# Altium PCB maintest.PcbDoc
Units mil, origin at the board's own origin, x right, y up, seen from the top; angles counter-clockwise.
Board outline 2900 x 2640 mil, 2 copper layers (Top Layer, Bottom Layer); 162 components, 79 nets, 347 pads, 0 vias.
Unrouted connection lines stored in the file: 128.
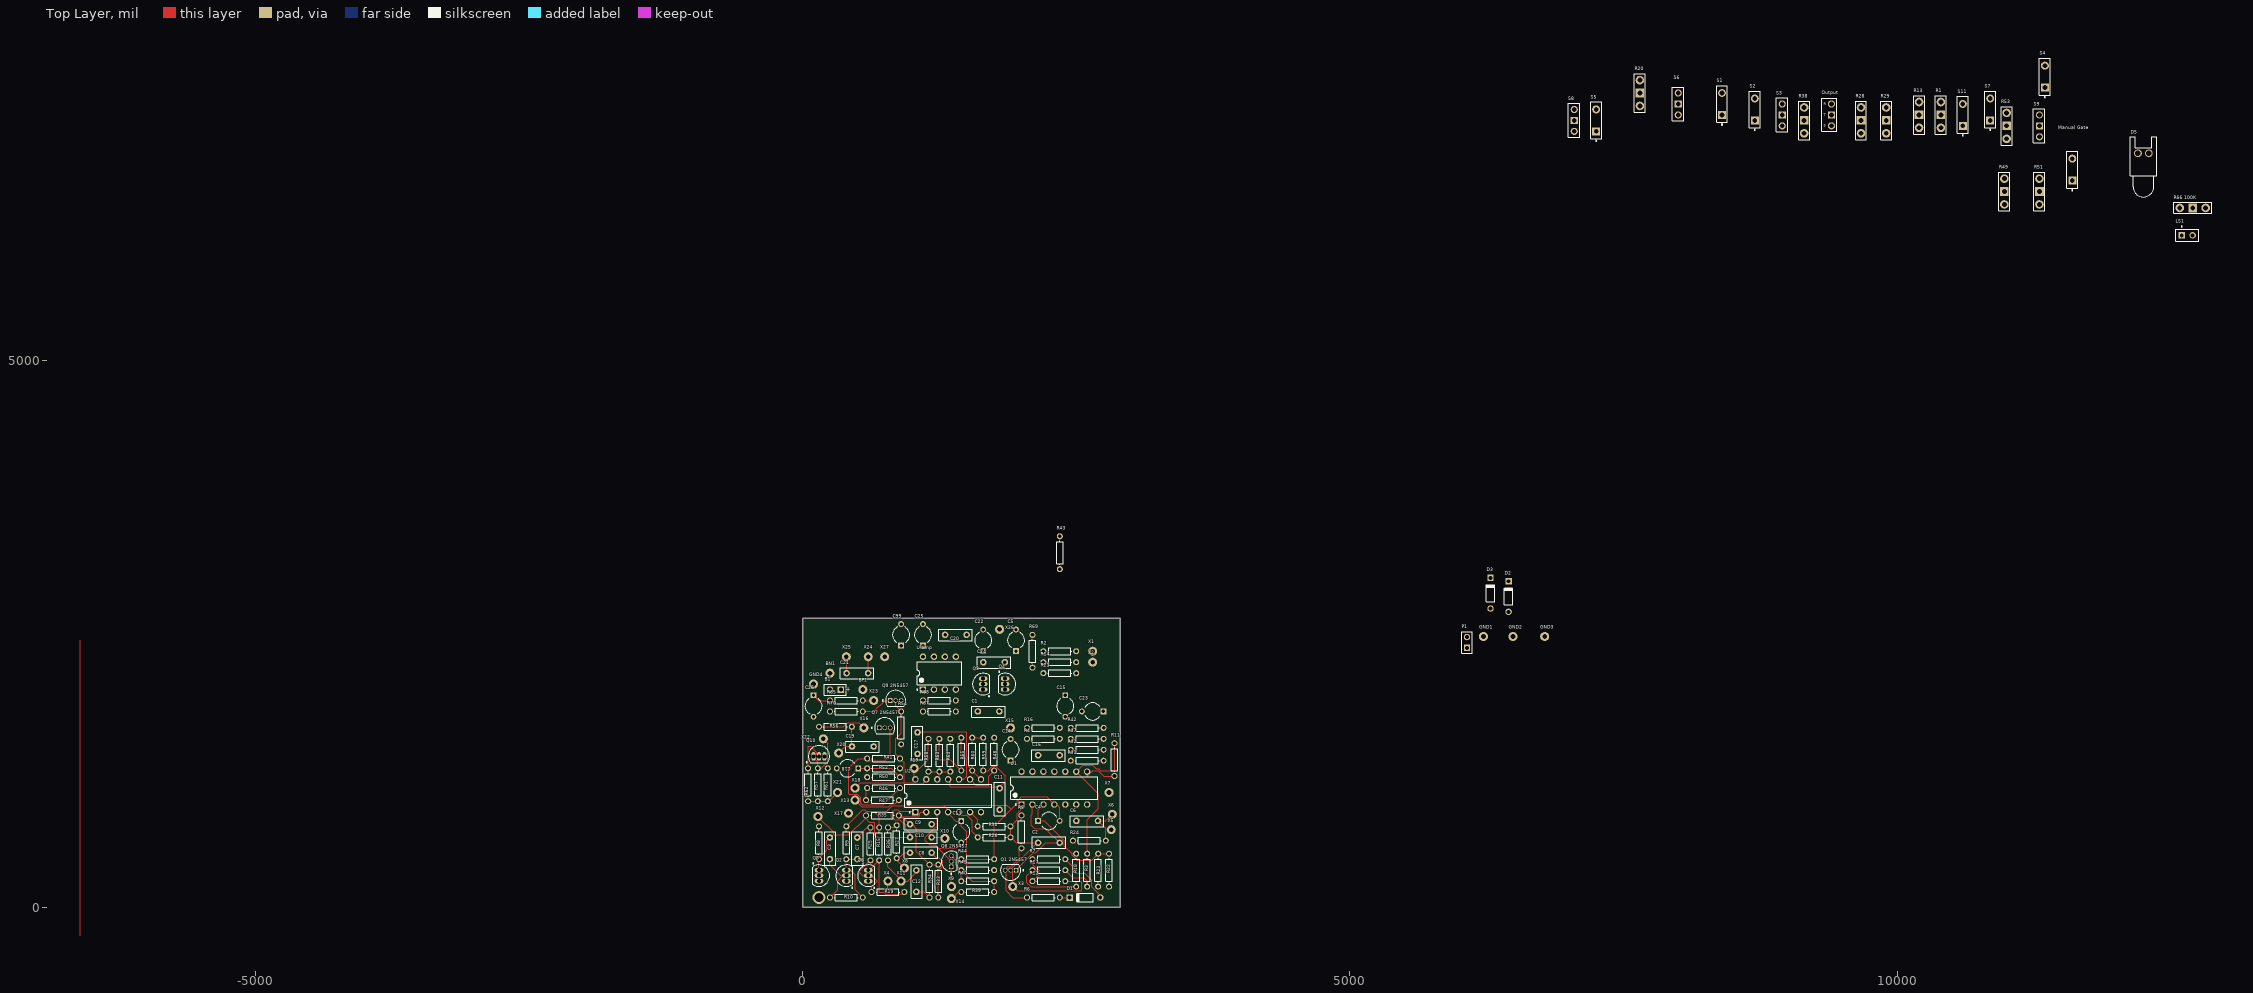
[diagram p0: Top Layer view]
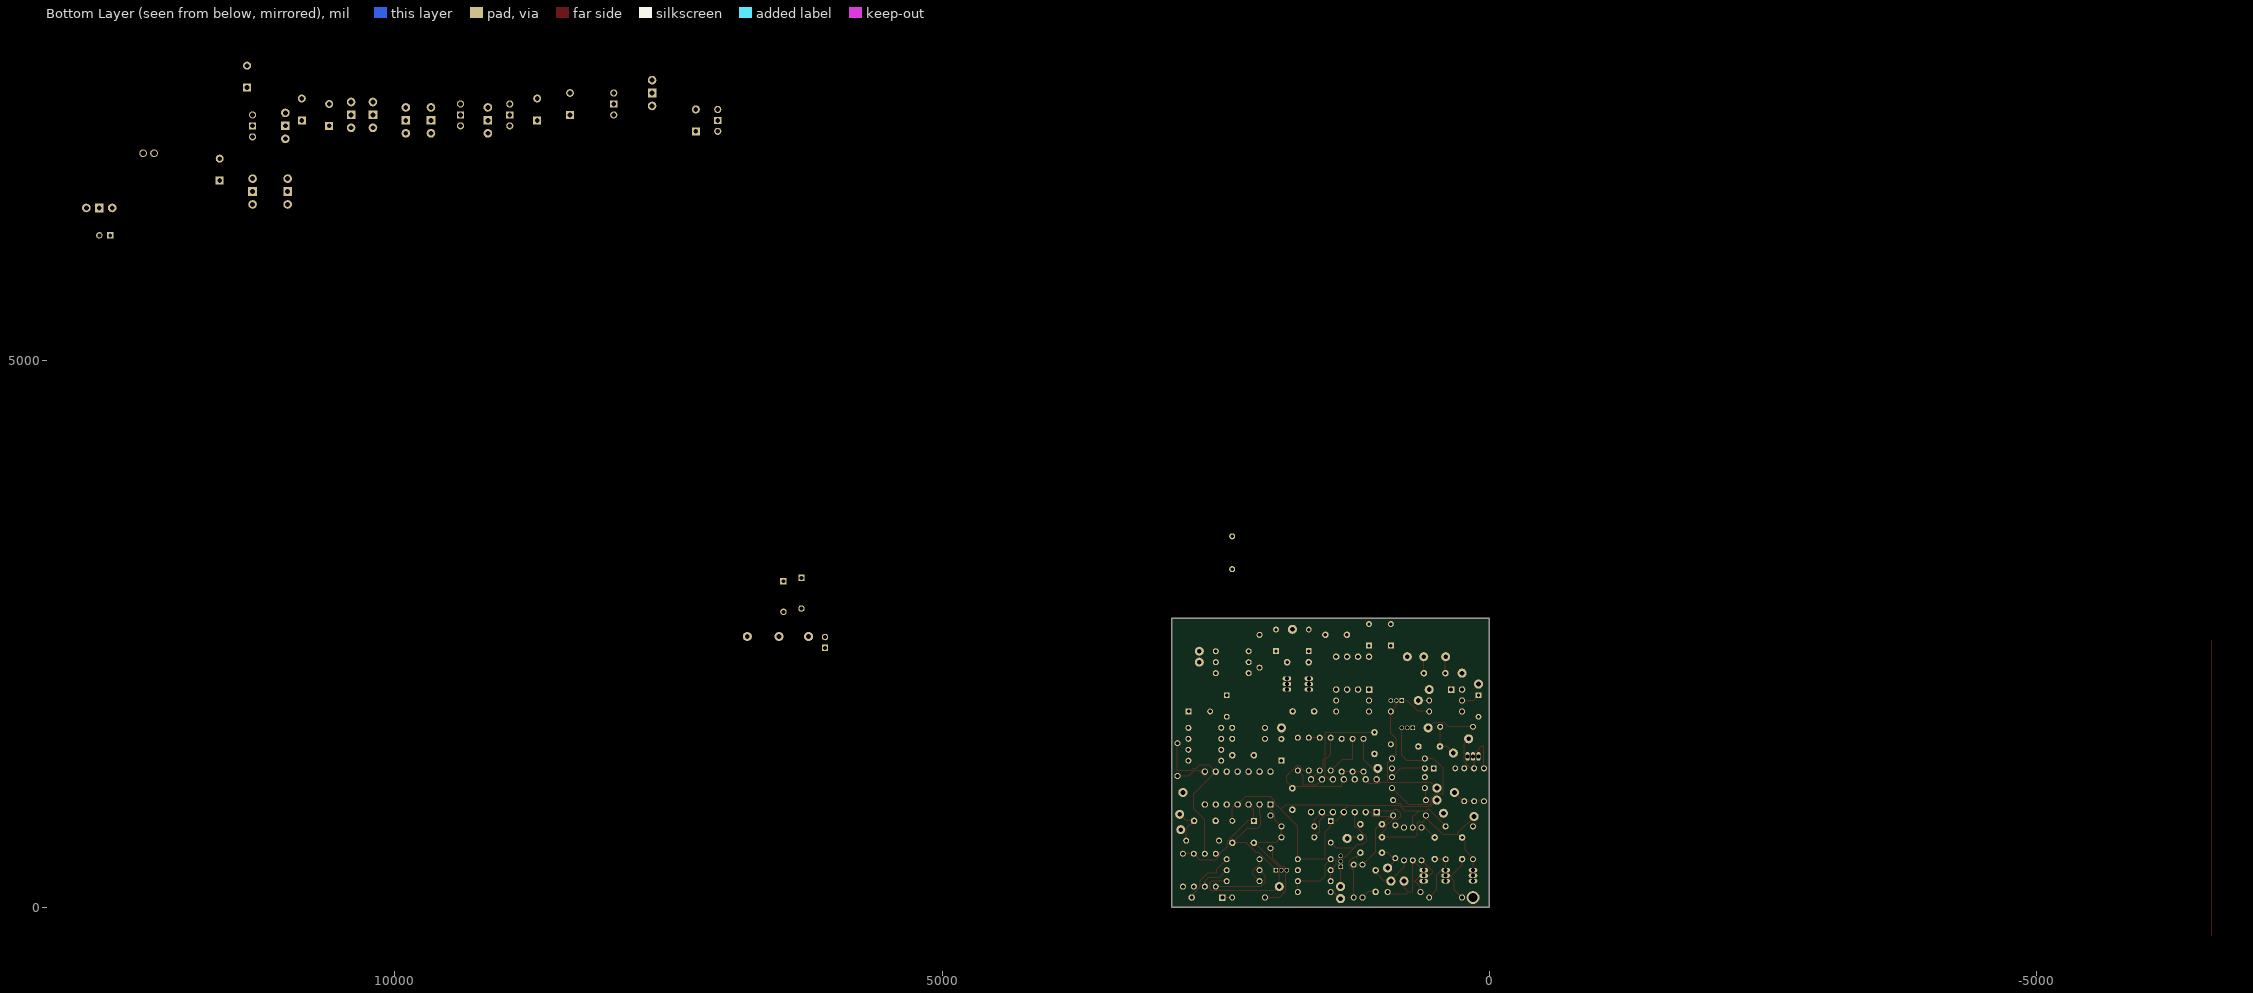
[diagram p1: Bottom Layer view, seen from below]

## Layer stack, top to bottom
Top Solder: solder mask 0.4, Solder Resist, Dk 3.5
Top Layer: signal copper 1.4
Dielectric 1: dielectric 12.6, FR-4, Dk 4.8
Bottom Layer: signal copper 1.4
Bottom Solder: solder mask 0.4, Solder Resist, Dk 3.5

## Board outline
0,0 0,2640 2900,2640 2900,0

## Design rules (kind name [scope] priority, off if disabled: settings)
Clearance [All] p1: gap=6 ignorepadtopadclearanceinfootprint=FALSE
PolygonConnect [All] p1: connectstyle=Relief reliefconductorwidth=10 reliefentries=4 polygonreliefangle="90 Angle" airgapwidth=10
RoutingVias [All] p1: holewidth=28 width=50 viastyle="Through Hole" minholewidth=28 minwidth=50 maxholewidth=28 maxwidth=50
SolderMaskExpansion [All] p1: expansion=4
UnRoutedNet [All] p1: checkbadconnections=TRUE
Width [All] p1: maxlimit=25 minlimit=6 preferedwidth=10 minimp=50.000000 maximp=50.000000 favimp=50.000000
29 further rules are at their usual default settings.

## Classes and differential pairs
component class "AD Generator": C18 D2 D3 "Manual Gate" "Q9 2N5457" Q10 R50 R51 R52 R53 R54 R57 R58 R61 R62 R63 R64 S8 X17 X18 X19 X21 X22
component class "Audio Amplifier": C20 C21 C22 C24 C25 C99 LS1 Output "R66 100K" R67 R68 R69 "U Amp" X24 X25 X26 X27
component class LFO: C16 C17 C19 C26 D5 R48 R49 R55 R56 R59 R60 R65 R70 S7 S9 X15 X16 X20 X23
component class Top: B1 BN1 BP1 C13 C14 C15 C23 GND1 GND2 GND3 GND4 P1 R37 R42 S11
component class VCA: "Q7 2N5457" R41 R46 R47 S5 X12 X13
component class "VC LPF": C8 C9 C10 C12 "Q8 2N5457" R27 R28 R29 R33 R34 R35 R36 R38 R39 R40 R43 R44 R45 S3 S4 S6 U2 X8 X9 X10 X11 X14
component class VCO: C1 C2 C4 C5 C6 C11 D1 "Q1 2N5457" Q3 Q4 R1 R2 R3 R4 R5 R6 R7 R11 R12 R13 R14 R16 R17 R18 R20 R21 R22 R23 R24 R26 R30 R31 R32 S1 S2 U1 X1 X2 X3 X5 X6 X7
component class WNS: C3 C7 Q2 Q5 Q6 R8 R9 R10 R15 R19 R25 X4

## Components (designator, comment, footprint, x,y, rotation, side; value= is the part's Value field where it differs from the comment)
B1 "9V Battery" BAT-2 300,1990 r180 top
BN1 "Pad" Pad 250,2140 r0 top
BP1 "Pad" Pad 550,1990 r0 top
C1 "Film" "Cap Film 5" 1700,1790 r180 top value=100pF
C2 "Film" "Cap Film 5" 2250,590 r0 top value=0.001uF
C3 "Cap Film 5" "Cap Film 5" 250,540 r270 top value=0.1uF
C4 "" CAPR5-4X5 2250,790 r0 top value=.1uF
C5 "" CAPR5-4X5 1950,2440 r90 top value=.1uF
C6 "Film" "Cap Film 5" 2600,790 r180 top value=0.1uF
C7 "Film" "Cap Film 5" 500,540 r270 top value=0.1uF
C8 "Film" "Cap Film 5" 1080,500 r0 top value=0.1uF
C9 "Film" "Cap Film 5" 1080,760 r0 top value=0.01uF
C10 "Film" "Cap Film 5" 1080,640 r180 top value=0.001uF
C11 "Film" "Cap Film 5" 1800,990 r270 top value=0.1uF
C12 "Film" "Cap Film 5" 1040,240 r270 top value=0.1uF
C13 "Cap2" CAPR5-4X5 1450,690 r270 top value=10uF
C14 "Cap2" CAPR5-4X5 1900,1440 r90 top value=10uF
C15 "" CAPR5-4X5 2400,1840 r270 top value=470uF
C16 "Cap Film 5" "Cap Film 5" 2250,1390 r180 top value=1uF
C17 "Cap Film 5" "Cap Film 5" 1050,1500 r90 top value=1uF
C18 "" CAPR5-4X5 410,1270 r180 top value=4.7uF
C19 "Cap Film 5" "Cap Film 5" 550,1470 r180 top value=1uF
C20 "Cap Film 5" "Cap Film 5" 1400,2490 r180 top value=0.1uF
C21 "Cap Film 5" "Cap Film 5" 500,2140 r180 top value=0.1uF
C22 "" CAPR5-4X5 1650,2440 r90 top value=220uF
C23 "" CAPR5-4X5 2650,1790 r180 top value=470uF
C24 "Cap Film 5" "Cap Film 5" 1750,2240 r180 top value=0.047uF
C25 "" CAPR5-4X5 1100,2490 r90 top value=10uF
C26 "" CAPR5-4X5 100,1840 r270 top value=470uF
C99 "" CAPR5-4X5 900,2490 r90 top value=10uF
D1 "Diode 1N914" DO-35 2580,90 r180 top
D2 "Diode 1N914" DO-35 6450,2840 r90 top
D3 "Diode 1N914" DO-35 6285,2870 r90 top
D5 "LED0" LED-0 12250,6890 r0 top
GND1 "Pad" Pad 6220,2475 r90 top
GND2 "Pad" Pad 6490,2475 r90 top
GND3 "Pad" Pad 6780,2475 r90 top
GND4 "Pad" Pad 100,2040 r90 top
LS1 "Speaker 8ohm 1W" PIN2 12600,6140 r0 top
"Manual Gate" "S10" SPST-2 11600,6740 r90 top
Output "LineOut" "Stereo Jack" 9400,7340 r270 top
P1 "Ground" HDR1X2 6070,2370 r90 top
"Q1 2N5457" "" ONSC-TO-92-3-29-11 1900,340 r180 top
Q2 "" TO-92A 400,290 r0 top
Q3 "2N3904" TO-92A 1650,2040 r0 top
Q4 "2N3904" TO-92A 1850,2040 r180 top
Q5 "" TO-92A 150,290 r180 top
Q6 "" TO-92A 600,290 r0 top
"Q7 2N5457" "" ONSC-TO-92-3-29-11 750,1640 r0 top
"Q8 2N5457" "" ONSC-TO-92-3-29-11 1360,420 r90 top
"Q9 2N5457" "" ONSC-TO-92-3-29-11 850,1890 r0 top
Q10 "" TO-92A 150,1380 r270 top
R1 "Potentiometer" Potentiometer 10400,7240 r0 top value=100K
R2 "Res1" AXIAL-0.3 2350,2340 r180 top value=75K
R3 "Res3" AXIAL-0.3 2600,340 r270 top value=270K
R4 "Res3" AXIAL-0.3 2200,1540 r0 top value=10K
R5 "Res1" AXIAL-0.3 2000,690 r270 top value=2M
R6 "Res1" AXIAL-0.3 2200,90 r0 top value=10K
R7 "Res1" AXIAL-0.3 2250,440 r0 top value=300K
R8 "Res1" AXIAL-0.3 150,590 r90 top value=1M
R9 "Res1" AXIAL-0.3 400,590 r90 top value=10K
R10 "Res1" AXIAL-0.3 400,90 r0 top value=470K
R11 "Res1" AXIAL-0.3 2850,1350 r270 top value=2K
R12 "Res1" AXIAL-0.3 2250,240 r180 top value=10K
R13 "Potentiometer" Potentiometer 10200,7240 r0 top value=100K
R14 "" AXIAL-0.3 2350,2240 r180 top value=100K
R15 "Res1" AXIAL-0.3 700,580 r90 top value=10K
R16 "Res3" AXIAL-0.3 2200,1640 r180 top value=2M
R17 "Res1" AXIAL-0.3 2250,340 r180 top value=10K
R18 "Res1" AXIAL-0.3 2500,340 r90 top value=15K
R19 "Res1" AXIAL-0.3 780,140 r0 top value=470K
R20 "Potentiometer" Potentiometer 7650,7440 r0 top value=100K
R21 "" AXIAL-0.3 2350,2140 r180 top value=36K
R22 "Res3" AXIAL-0.3 2800,340 r90 top value=4.7K
R23 "Res3" AXIAL-0.3 2700,340 r90 top value=4.7K
R24 "Res1" AXIAL-0.3 2620,610 r180 top value=100K
R25 "Res1" AXIAL-0.3 620,580 r90 top value=100K
R26 "Res1" AXIAL-0.3 1750,640 r180 top value=10K
R27 "Res1" AXIAL-0.3 860,600 r90 top value=47K
R28 "Potentiometer" Potentiometer 9670,7190 r0 top value=100K
R29 "Potentiometer" Potentiometer 9900,7190 r0 top value=100K
R30 "Res1" AXIAL-0.3 1750,740 r180 top value=2M
R31 "Res1" AXIAL-0.3 2600,1340 r180 top value=100K
R32 "Res1" AXIAL-0.3 2600,1440 r180 top value=10K
R33 "Res1" AXIAL-0.3 1240,240 r90 top value=4.7M
R34 "Res1" AXIAL-0.3 1160,240 r90 top value=3M
R35 "Res1" AXIAL-0.3 730,840 r180 top value=4.7M
R36 "Res1" AXIAL-0.3 780,580 r90 top value=47K
R37 "Res1" AXIAL-0.3 2600,1540 r0 top value=4.7
R38 "Potentiometer" Potentiometer 9150,7190 r0 top value=100K
R39 "Res1" AXIAL-0.3 1600,140 r0 top value=39K
R40 "Res1" AXIAL-0.3 1600,240 r180 top value=39K
R41 "Res1" AXIAL-0.3 740,1360 r0 top value=470K
R42 "Res1" AXIAL-0.3 2600,1640 r0 top value=4.7K
R43 "Res1" AXIAL-0.3 2350,3240 r90 top value=27K
R44 "Res1" AXIAL-0.3 1600,440 r180 top value=100K
R45 "Res1" AXIAL-0.3 1600,340 r180 top value=100K
R46 "Res1" AXIAL-0.3 740,1090 r0 top value=1M
R47 "Res1" AXIAL-0.3 730,980 r0 top value=100K
R48 "Res1" AXIAL-0.3 1750,1400 r90 top value=3K
R49 "Potentiometer" Potentiometer 10980,6540 r0 top
R50 "Res1" AXIAL-0.3 740,1190 r0 top value=820
R51 "Potentiometer" Potentiometer 11300,6540 r0 top value=1M
R52 "R52" AXIAL-0.3 740,1270 r0 top value=10K
R53 "Potentiometer" Potentiometer 11000,7140 r0 top value=1M
R54 "" AXIAL-0.3 900,1640 r90 top value=4.7K
R55 "Res1" AXIAL-0.3 1450,1400 r90 top value=100K
R56 "Res1" AXIAL-0.3 300,1650 r0 top value=75K
R57 "Res1" AXIAL-0.3 140,1120 r90 top value=200
R58 "R52" AXIAL-0.3 1150,1390 r90 top value=100K
R59 "Res1" AXIAL-0.3 1650,1400 r90 top value=100K
R60 "Res1" AXIAL-0.3 1550,1400 r270 top value=100K
R61 "Res1" AXIAL-0.3 230,1120 r270 top value=10K
R62 "Res1" AXIAL-0.3 50,1120 r90 top value=10K
R63 "R52" AXIAL-0.3 1250,1390 r90 top value=150K
R64 "R52" AXIAL-0.3 1350,1390 r90 top value=150K
R65 "Res1" AXIAL-0.3 400,1890 r0 top value=3K
"R66 100K" "Potentiometer" Potentiometer 12700,6390 r90 top
R67 "Res1" AXIAL-0.3 1250,1790 r0 top value=100K
R68 "Res1" AXIAL-0.3 1250,1890 r0 top value=20K
R69 "Res1" AXIAL-0.3 2100,2340 r270 top value=10
R70 "Res1" AXIAL-0.3 400,1790 r180 top value=3K
S1 "AR Mod On/Off" SPST-2 8400,7340 r90 top
S2 "Sync Effect" SPST-2 8700,7290 r90 top
S3 "VCO WAVE TO VCF SELECT" "SPDT Switch" 8950,7240 r90 top
S4 "NOISE TO VCF" SPST-2 11350,7590 r90 top
S5 "VCA Bypass" SPST-2 7250,7190 r90 top
S6 "VCF Mod Source Select" "SPDT Switch" 8000,7340 r90 top
S7 "SW-SPST" SPST-2 10850,7290 r90 top
S8 "Repeat" "SPDT Switch" 7050,7190 r90 top
S9 "SPDT Switch" "SPDT Switch" 11300,7140 r90 top
S11 "Power Supply Switch" SPST-2 10600,7240 r90 top
U1 "LM324J" J14A 2300,1090 r90 top
U2 "LM324J" J14A 1330,1020 r90 top
"U Amp" "LM386N-1" N08E 1250,2140 r90 top
X1 "Pad" Pad 2650,2340 r0 top
X2 "Pad" Pad 2650,2240 r0 top
X3 "Pad" Pad 1920,190 r0 top
X4 "Pad" Pad 780,240 r0 top
X5 "Pad" Pad 2820,710 r0 top
X6 "Pad" Pad 2830,850 r0 top
X7 "Pad" Pad 2800,1050 r0 top
X8 "Pad" Pad 930,360 r0 top
X9 "Pad" Pad 1360,190 r0 top
X10 "Pad" Pad 1300,630 r0 top
X11 "Pad" Pad 900,240 r0 top
X12 "Pad" Pad 140,830 r0 top
X13 "Pad" Pad 480,980 r0 top
X14 "Pad" Pad 1360,80 r0 top
X15 "Pad" Pad 1900,1640 r0 top
X16 "Pad" Pad 560,1640 r0 top
X17 "Pad" Pad 420,860 r0 top
X18 "Pad" Pad 480,1090 r0 top
X19 "Pad" Pad 1020,1270 r0 top
X20 "Pad" Pad 330,1410 r0 top
X21 "Pad" Pad 320,1050 r0 top
X22 "Pad" Pad 190,1540 r0 top
X23 "Pad" Pad 650,1890 r0 top
X24 "Pad" Pad 600,2290 r0 top
X25 "Pad" Pad 400,2290 r0 top
X26 "Pad" Pad 1800,2540 r0 top
X27 "Pad" Pad 750,2290 r0 top

## Footprints (in the part's own frame and the unit in brackets; to place one, negate y for a bottom-side part, rotate by r counter-clockwise, add the part's x,y. Pads: shape width x height; smd on the part's side, far side on the other; paste and mask are expansions set on the pad)
AXIAL-0.3 [mm] "Axial Device, Thru-Hole; 2 Leads; 0.3 in Pin Spacing"
  round 1.4 hole 0.85: 1(-3.81,0) 2(3.81,0)
  silkscreen extent -2.77,-0.76 2.77,0.76
BAT-2 [mm] "Battery; 2 Leads"
  rect 1.5x1.5 hole 0.9: 1(-1.27,0)
  round 1.5 hole 0.9: 2(1.27,0)
  silkscreen extent -2.54,-1.27 2.54,1.27
"Cap Film 5" [mil] "5mm length capacitor"
  round 60 hole 31.5: 1(-98.43,0) 2(98.43,0)
  silkscreen extent -152,-49 155,53
CAPR5-4X5 [mm] "Capacitor; 2 Leads"
  rect 1.35x1.35 hole 0.8: 1(-2.5,0)
  round 1.35 hole 0.8: 2(2.5,0)
  silkscreen extent -1.69,-2 1.82,2
DO-35 [mm] "Diode, Axial; Body 3.8 x 1.9 mm (LxDia. max), Lead Dia. 0.53 mm (max)"
  round 1.5 hole 0.9: 1(-3.55,0)
  rect 1.5x1.5 hole 0.9: 2(3.55,0)
  silkscreen extent -1.95,-0.95 2.05,0.95
HDR1X2 [mm] "Connector; Header; 2 Position"
  rect 1.5x1.5 hole 0.9: 1(0,0)
  round 1.5 hole 0.9: 2(2.54,0)
  silkscreen extent -1.27,-1.27 3.81,1.27
J14A [mm] "DIP, 14-Pin, Row Spacing 7.62 mm, Pitch 2.54 mm"
  rect 1.5x1.5 hole 0.9: 1(-3.81,7.62)
  round 1.5 hole 0.9: 2(-3.81,5.08) 3(-3.81,2.54) 4(-3.81,0) 5(-3.81,-2.54) 6(-3.81,-5.08) 7(-3.81,-7.62) 8(3.81,-7.62) 9(3.81,-5.08) 10(3.81,-2.54) 11(3.81,0) 12(3.81,2.54) 13(3.81,5.08) 14(3.81,7.62)
  silkscreen extent -3.93,-10.1 2.65,10.1, body extent -3.6,-10.1 3.6,10.1, height 5.08
LED-0 [mil] "LED; 2 Leads"
  round 70 hole 50: 1(50,0) 2(-50,0)
  silkscreen extent -120,-400 120,150
N08E [mm] "DIP, 8-Pin, Row Spacing 7.62 mm, Pitch 2.54 mm"
  rect 1.5x1.5 hole 0.9: 1(-3.81,3.81)
  round 1.5 hole 0.9: 2(-3.81,1.27) 3(-3.81,-1.27) 4(-3.81,-3.81) 5(3.81,-3.81) 6(3.81,-1.27) 7(3.81,1.27) 8(3.81,3.81)
  silkscreen extent -3.93,-5.15 2.65,5.23, body extent -3.6,-5.15 3.6,5.15, height 5.34
ONSC-TO-92-3-29-11 [mm] "TO, 3-Leads, Body Dia 4.7mm, Pitch 1.27mm"
  rect 1.05x1.05 hole 0.8: 1(-1.27,0)
  round 1.05 hole 0.8: 2(0,0) 3(1.27,0)
  silkscreen extent -3.08,-1.34 2.35,2.35, body extent -2.35,-1.33 2.36,2.36, height 7.87
Pad [mm] "Simple Pad"
  round 2.1 hole 1.1: 1(0,0)
PIN2 [mm] "Photosensitive Diode; 2 Leads"
  rect 1.5x1.5 hole 0.9: 1(0,0)
  round 1.5 hole 0.9: 2(2.54,0)
  silkscreen extent -1.4,-1.4 3.94,2.17
Potentiometer [mm] "Normal Pinout"
  round 2 hole 1.1: 1(0,-3) 3(0,3)
  rect 2x2 hole 1.1: 2(0,0)
  silkscreen extent -1.27,-4.44 1.27,4.44
"SPDT Switch" [mil] "SPDT Switch"
  round 65 hole 43.31: 1(100,0) 3(-100,0)
  rect 65x65 hole 43.31: 2(0,0)
  silkscreen extent -155,-50 155,55
SPST-2 [mm] "Switch; 2 Leads"
  rect 1.85x1.85 hole 1.1: 1(-2.54,0)
  round 1.85 hole 1.1: 2(2.54,0)
  silkscreen extent -4.89,-1.27 4.28,1.27
"Stereo Jack" [mil] "Stereo Jack"
  round 65 hole 43.31: 0(0,0) 2(200,0)
  rect 65x65 hole 43.31: 1(100,0)
  silkscreen extent -50,-90 250,50
TO-92A [mm] "TO, Flat Index; 3 In-Line, Axial Leads; Body Dia. 4.5mm; Leads 0.51 x 0.48 mm (max)"
  oval 2x1 hole 0.9: 1(0,-1.27) 2(0,0) 3(0,1.27)
  silkscreen extent -2.48,-2.95 1.5,2.48, body extent -2.48,-2.5 1.5,2.5, height 6.86

## Part data
B1: library part Battery, "Multicell Battery", LatestRevisionDate=17-Jul-2002, LatestRevisionNote="Re-released for DXP Platform.", PackageDescription="Battery; 2 Leads", PackageReference=BAT-2, Published=24-Mar-1999, Publisher="Altium Limited"
C1 C2 C6 C7 C8 C9 C10 C11 C12: library part "Cap Film 5"
C4 C5 C15 C18 C22 C23 C25 C26 C99: library part Cap2, "Capacitor", PackageDescription="Capacitor; 2 Leads", PackageReference=CAPR5-4X5, Published=23-Sep-2002, Publisher="Altium Limited"
C13 C14: "Capacitor", PackageDescription="Capacitor; 2 Leads", PackageReference=CAPR5-4X5, Published=23-Sep-2002, Publisher="Altium Limited"
D1 D2 D3: "High Conductance Fast Diode", Code_JEDEC=DO-204-AH, ComponentLink1Description="Manufacturer Link", ComponentLink1URL=http://www.fairchildsemi.com/, ComponentLink2Description=Datasheet, ComponentLink2URL=http://www.fairchildsemi.com/ds/1N%2F1N4448.pdf, DatasheetVersion=1997, LatestRevisionDate=17-Jul-2002, LatestRevisionNote="Re-released for DXP Platform.", PackageDescription="Diode, Axial; Body 3.8 x 1.9 mm (LxDia. max), Lead Dia. 0.53 mm (max)", PackageReference=DO-35, Published=8-Jun-2000, Publisher="Altium Limited"
D5: "Typical INFRARED GaAs LED", LatestRevisionDate=08-Jul-2005, LatestRevisionNote="Mech Layer 1 removed.", PackageDescription="LED; 2 Leads", PackageReference=LED-0, Published=8-Jun-2000, Publisher="Altium Limited"
LS1: library part Speaker, "Loudspeaker", LatestRevisionDate=17-Jul-2002, LatestRevisionNote="Re-released for DXP Platform.", PackageReference=PIN2, Published=24-Mar-1999, Publisher="Altium Limited"
"Manual Gate": library part SW-PB, "Switch", LatestRevisionDate=17-Jul-2002, LatestRevisionNote="Re-released for DXP Platform.", PackageDescription="Switch; 2 Leads", PackageReference=SPST-2, Published=24-Mar-1999, Publisher="Altium Limited"
Output: library part "Stereo Jack", "Stereo Jack"
P1: library part "Header 2", "Header, 2-Pin", LatestRevisionDate=17-Jul-2002, LatestRevisionNote="Re-released for DXP Platform.", Publisher="Altium Limited"
"Q1 2N5457" "Q7 2N5457" "Q8 2N5457" "Q9 2N5457": library part J310, "JFET VHF / UHF Amplifier, N-Channel - Depletion, 3-Pin TO-92, Bulk Box", Manufacturer="On Semiconductor", Supplier Part Number 1=J310OS-ND, Channel Polarity="N Channel", ComponentLink1Description="Manufacturer URL", ComponentLink1URL=http://www.onsemi.com/, ComponentLink2Description=Datasheet, ComponentLink2URL=http://www.onsemi.com/pub_link/Collateral/J309-D.PDF, ComponentLink3Description="Package Specification", ComponentLink3URL=http://www.onsemi.cn/pub_link/Collateral/2N6426-D.PDF, DatasheetVersion="Rev. 1", IDSS Max (uA)=60000, IDSS Min (uA)=24000, Mounting Technology="Through Hole", PackageDescription="3-Pin Transistor Outline, Body 4.825 x 3.685 mm, Pitch 1.27 mm", PackageReference=TO-92-3-29-11_AM_SL, PackageVersion="Rev. AM", Packing="Bulk Box", PartNumber=J310, Supplier 1=Digi-Key, V(BR)GSS Min (V)=25
Q2 Q5 Q6: library part 2N3904, "NPN General Purpose Amplifier", ComponentLink1Description="Manufacturer Link", ComponentLink1URL=http://www.fairchildsemi.com/, ComponentLink2Description=Datasheet, ComponentLink2URL=http://www.fairchildsemi.com/ds/2N%2F2N3904.pdf, DatasheetVersion=1997, LatestRevisionDate=15-Jan-2003, LatestRevisionNote="PCB Footprint 'BCY-W3/D4.7' replaced", PackageDescription="TO, Flat Index; 3 In-Line, Axial Leads; Body Dia. 4.5mm; Leads 0.51 x 0.48 mm (max)", PackageReference=TO-92A, PackageVersion=Sep-1998, Published=8-Jun-2000, Publisher="Altium Limited"
Q3 Q4: "NPN General Purpose Amplifier", ComponentLink1Description="Manufacturer Link", ComponentLink1URL=http://www.fairchildsemi.com/, ComponentLink2Description=Datasheet, ComponentLink2URL=http://www.fairchildsemi.com/ds/2N%2F2N3904.pdf, DatasheetVersion=1997, LatestRevisionDate=15-Jan-2003, LatestRevisionNote="PCB Footprint 'BCY-W3/D4.7' replaced", PackageDescription="TO, Flat Index; 3 In-Line, Axial Leads; Body Dia. 4.5mm; Leads 0.51 x 0.48 mm (max)", PackageReference=TO-92A, PackageVersion=Sep-1998, Published=8-Jun-2000, Publisher="Altium Limited"
Q10: library part 2N3906, "PNP General Purpose Amplifier", ComponentLink1Description="Manufacturer Link", ComponentLink1URL=http://www.fairchildsemi.com/, ComponentLink2Description=Datasheet, ComponentLink2URL=http://www.fairchildsemi.com/ds/2N%2F2N3906.pdf, DatasheetVersion=1997, LatestRevisionDate=15-Jan-2003, LatestRevisionNote="PCB Footprint 'BCY-W3/D4.7' replaced", PackageDescription="TO, Flat Index; 3 In-Line, Axial Leads; Body Dia. 4.5mm; Leads 0.51 x 0.48 mm (max)", PackageReference=TO-92A, PackageVersion=Sep-1998, Published=8-Jun-2000, Publisher="Altium Limited"
R1 R13 R20 R28 R29 R38 R49 R51 R53 "R66 100K": "My Own"
R2 R5 R6 R7 R8 R9 R10 R11 R12 R15 R17 R18 R19 R24 R25 R26 R27 R30 R31 R32 R33 R34 R35 R36 R37 R39 R40 R41 R42 R43 R44 R45 R46 R47 R48 R50 R55 R56 R57 R59 R60 R61 R62 R65 R67 R68 R69 R70: "Resistor", LatestRevisionDate=17-Jul-2002, LatestRevisionNote="Re-released for DXP Platform.", PackageDescription="Axial Device, Thru-Hole; 2 Leads; 0.3 in Pin Spacing", PackageReference=AXIAL-0.3, Published=8-Jun-2000, Publisher="Altium Limited"
R3 R4 R14 R16 R21 R22 R23 R52 R54 R58 R63 R64: library part Res1, "Resistor", LatestRevisionDate=17-Jul-2002, LatestRevisionNote="Re-released for DXP Platform.", PackageDescription="Axial Device, Thru-Hole; 2 Leads; 0.3 in Pin Spacing", PackageReference=AXIAL-0.3, Published=8-Jun-2000, Publisher="Altium Limited"
S1 S2 S4 S5 S11: library part SW-SPST, "Single-Pole, Single-Throw Switch", LatestRevisionDate=17-Jul-2002, LatestRevisionNote="Re-released for DXP Platform.", PackageDescription="Switch; 2 Leads", PackageReference=SPST-2, Published=24-Mar-1999, Publisher="Altium Limited"
S3 S6 S8: library part "SPDT Switch", "SPDT Switch"
S7: "Single-Pole, Single-Throw Switch", LatestRevisionDate=17-Jul-2002, LatestRevisionNote="Re-released for DXP Platform.", PackageDescription="Switch; 2 Leads", PackageReference=SPST-2, Published=24-Mar-1999, Publisher="Altium Limited"
U1 U2: "Low Power Quad Operational Amplifier, 14-pin CerDIP", Manufacturer="National Semiconductor", PackageTopMarking=NSUZXYYTT*LM324J, PowerWise=N, ComponentLink1Description="Manufacturer URL", ComponentLink1URL=http://www.national.com/, ComponentLink2Description="LM324 Datasheet", ComponentLink2URL=http://www.national.com/ds/LM/LM324.pdf, ComponentLink3Description="LM324 Web Page", ComponentLink3URL=http://www.national.com/pf/LM/LM324.html, ComponentLink4Description="J14A Package Page", ComponentLink4URL=http://www.national.com/packaging/folders/j14a.html, CompType=Amplifiers, DatasheetVersion=Aug-2000, High-Reliability=Y, PackageDescription="Cerdip, .400 x .310in Body, 14 Lead, .300in Centers, .100in Pitch", PackageReference=J14A, PackageVersion="revJ, Jul-2002", PartNumber=LM324J, PinCount=14, RoHS=N
"U Amp": "Low Voltage Audio Power Amplifier, 8-pin MDIP", Manufacturer="National Semiconductor", PackageTopMarking=NSUZXYTTE#*LM*386N-1, PowerWise=N, Code_JEDEC=MS-001-BA, ComponentLink1Description="Manufacturer URL", ComponentLink1URL=http://www.national.com/, ComponentLink2Description="LM386 Datasheet", ComponentLink2URL=http://www.national.com/ds/LM/LM386.pdf, ComponentLink3Description="LM386 Web Page", ComponentLink3URL=http://www.national.com/pf/LM/LM386.html, ComponentLink4Description="N08E Package Page", ComponentLink4URL=http://www.national.com/packaging/folders/n08e.html, CompType="Audio IC", DatasheetVersion=Aug-2000, High-Reliability=Y, PackageDescription="MDIP, .365 x .250 x .130in, 8 Lead, .100in Pitch", PackageReference=N08E, PackageVersion="revG, May-2006", PartNumber=LM386N-1, PinCount=8, RoHS=N

## Free pads (board coordinates)
  round 118.11 hole 78.74: 2(150,90)

## Nets (pads, with @x,y where several pads share a name; then routed paths per layer and width w, separated by ;. In a path a pad name is that pad's centre, name@x,y a point inside that pad or via, vN(x,y) a via of type N, cw(c..) or ccw(c..) an arc to the next point about the centre after c; other vN are vias at no path point)
BN: "R66 100K.1" "U Amp.2" "U Amp.4" B1.2 BN1.1 C5.2 C11.1 C14.2 C15.2 C16.2 C18.2 C19.1 C20.1 C23.2 C25.2 C26.2 LS1.2 Q2.1 Q5.2 Q6.1 Q10.3 R1.3 R5.1 R13.3 R18.2 R22.1 R24.2 R42.2 R43.1 R45.1 R46.1 R47.1 R54.1 R59.1 R61.1 R64.2 R68.1 R69.1 U1.11 U2.11 | length 1044.3
  Top Layer w10: R47.1 580,1080 R46.1 ; U2.11 1350,1150 1350,1100 1788.43,1100 C11.1 1800,1100 1850,1150 1850,1204.53 1765.97,1288.56 1761.44,1288.56 1750,1300 1738.56,1288.56 1734.03,1288.56 1695.47,1250 R59.1
BP: "Manual Gate.1" "Q9 2N5457.1" "U Amp.6" BP1.1 C4.2 C13.1 C20.2 C23.1 R1.1 R3.2 R8.2 R9.2 R15.2 R16.1 R17.1 R23.1 R37.2 R44.1 R55.1 R63.2 R70.1 S11.2 U1.4 U2.4 | length 4790.6
  Top Layer w10: R9.2 550,890 570,890 580,880 650,880 ; R70.1 650,1790 750,1890 800,1890 ; R15.2 700,830 650,880 ; R63.2 1250,1350 1350,1350 R55.1 ; U2.4 1330,890 1290,930 ; 1350,840 1401.57,788.43 C13.1 1450,740 1500,690 1500,440 R44.1 1750,740 1959.47,949.47 1959.47,974.08 1965.92,980.53 1970.53,980.53 2000,1010 2230,1010 U1.4 2320,940 2348.43,911.57 C4.2 ; 1900,900 1867.43,932.57 1292.57,932.57 1290,930 ; R17.1 2470,270 2570,270 2600,240 R3.2 ; 650,880 770,880 820,930 1290,930
GND: "Q8 2N5457.2" C13.2 C14.1 C15.1 GND1.1 GND2.1 GND3.1 GND4.1 Output.2 P1.1 P1.2 R20.3 R27.2 R28.1 R28.2 R32.2 R36.2 R37.1 R42.1 U2.3 | length 947.3
  Top Layer w10: R36.2 R27.2@860,730 ; U2.3 1230,730 1210,730 1120,640 1120,610 1160,570 1210,570 1240,540 ; 1360,420 1240,540 ; C13.2 1398.43,540 1240,540
NetB1_1: B1.1 S11.1
NetC1_1: C1.1 Q3.3 R16.2 U1.13
NetC1_2: C1.2 R4.1 U1.14
NetC2_1: "Q1 2N5457.2" C2.1 R12.1 R26.1 R30.1 S3.3 U1.1 X3.1 | length 2003.4
  Top Layer w10: U1.1 2000,894.53 1961.44,855.97 1961.44,801.44 R30.1 R26.1 1950,590 C2.1@2143.11,590 ; C2.1 C2.1@2143.11,590 ; R12.1 2540,240 2550,230 2550,150 1960,150 X3.1 1918.33,191.67 1918.33,321.67 1900,340 1900,346.89 C2.1@2143.11,590
NetC2_2: "Q1 2N5457.1" C2.2 Q4.3 U1.2 | length 1023.5
  Top Layer w10: 1950,340 1950,344.53 2105.47,500 2130,500 2220,590 C2.2 2218.43,720 2120,720 2090,750 2090,840 2100,850 U1.2
NetC3_1: C3.1 Q5.1 R8.1 | length 339.8
  Top Layer w10: Q5.1 R8.1 150,450 220,520 220,608.43 C3.1
NetC3_2: C3.2 Q2.2 R10.1 | length 478.6
  Top Layer w10: R10.1 320,160 320,240 360,280 ; C3.2 250,390 350,290 Q2.2
NetC4_1: C4.1 C5.1 Q4.2 R22.2 R23.2 U1.3 U1.10 U1.12 | length 1028.2
  Top Layer w10: U1.3 2151.57,891.57 C4.1 2206.41,790 2389.43,606.98 2389.43,560.57 2461.44,488.56 2461.44,474.03 2505.47,430 2640,430 R23.2 R22.2
NetC6_1: C6.1 R24.1 S2.2 X6.1 | length 367.4
  Top Layer w10: R24.1 2767.66,610 2767.66,720.76 C6.1 2770,790 X6.1
NetC6_2: C6.2 R17.2 R18.1 U1.6 | length 599.1
  Top Layer w10: R17.2 2050,290 2050,226.91 2086.91,190 R18.1
NetC7_1: C7.1 R25.2 | length 157.9
  Top Layer w10: C7.1 591.57,730 R25.2
NetC7_2: C7.2 Q2.3 R9.1 R10.2 | length 536.2
  Top Layer w10: C7.2 401.57,441.57 R9.1 Q2.3 440,340 480,300 480,160 R10.2
NetC8_1: C8.1 R27.1 S3.2 X8.1 | length 269.6
  Top Layer w10: R27.1 R27.1@860,430 ; X8.1 R27.1@860,430 ; C8.1 930,500 R27.1@860,430
NetC8_2: C8.2 R33.1 | length 480.1
  Top Layer w10: C8.2 1218.43,460 1240,460 1278.56,421.44 1278.56,374.03 1240,335.47 R33.1
NetC9_1: C9.1 R33.2 R34.2 R35.1 U2.2 | length 956
  Top Layer w10: R35.1@870,820 921.57,820 C9.1 1000,760 1040,720 1040,510 R34.2 R33.2 ; R35.1 890,830 995.39,830 995.92,829.47 1064.08,829.47 1070.53,835.92 1070.53,859.36 1081.17,870 U2.2
NetC9_2: "Q8 2N5457.1" C9.2 R28.3 R29.1 R29.2 X9.1 | length 170
  Top Layer w10: X9.1 1360,360
NetC10_1: C10.1 R29.3 X10.1 | length 125.7
  Top Layer w10: C10.1 1290,640 X10.1
NetC10_2: "Q7 2N5457.1" C10.2 R35.2 S5.1 U2.1 X12.1 | length 1723.3
  Top Layer w10: X12.1 283.2,686.8 283.2,663.2 423.2,663.2 R35.2@575,815 ; R35.2 580,820 R35.2@575,815 ; U2.1 1030,878.56 881.44,878.56 870,890 840,890 810,860 810,830 840,800 890,800 940.57,749.43 940.57,719 981.57,678 C10.2 680,640 660,660 660,780 610,780 R35.2@575,815
NetC11_2: C11.2 R30.2 U2.6 | length 159
  Top Layer w10: U2.6 1600,800 R30.2
NetC12_1: C12.1 R36.1 S4.2 X11.1 | length 431.3
  Top Layer w10: R36.1 780,370 900,250 X11.1 960,240 1040,320 C12.1
NetC12_2: C12.2 R34.1 | length 141.4
  Top Layer w10: C12.2 1108.43,141.57 R34.1
NetC16_1: C16.1 R48.1 U2.9 | length 347.1
  Top Layer w10: U2.9 1584,1116 1700,1116 1700,1200 R48.1
NetC17_1: C17.1 S7.2 S9.3
NetC17_2: C17.2 D5.2 R49.1 R49.2 R56.1 R60.2 S2.1 S7.1 U2.8 X16.1 | length 1380.6
  Top Layer w10: R56.1 370,1650 408.56,1688.56 511.44,1688.56 X16.1 ; C17.2 1498.43,1598.43 1500,1600 1500,1372.63 1516,1356.63 1516,1284 R60.2 U2.8
NetC18_1: C18.1 R50.2 R52.1 | length 414.7
  Top Layer w10: C18.1 R52.1 810,1270 R50.2
NetC19_2: C19.2 R56.2 S9.1 X20.1 | length 327.1
  Top Layer w10: X20.1 390,1470 C19.2 450,1471.57 R56.2
NetC21_1: C21.1 Output.1 X24.1 | length 150.7
  Top Layer w10: C21.1 600,2141.57 X24.1
NetC21_2: "R66 100K.2" C21.2 X25.1 | length 150.7
  Top Layer w10: X25.1 401.57,2288.43 C21.2
NetC22_1: "U Amp.5" C22.1 C24.2
NetC22_2: C22.2 LS1.1 X26.1
NetC24_1: C24.1 R69.2
NetC25_1: "U Amp.7" C25.1
NetC26_1: C26.1 R65.1 R70.2 | length 170.1
  Top Layer w10: C26.1 148.43,1890 R65.1
NetC99_1: "U Amp.1" C99.1
NetC99_2: "U Amp.8" C99.2
NetD1_1: D1.1 R7.2 U1.7 | length 535.2
  Top Layer w10: R7.2 2490,350 2490,310 2580,310 2640,250 2640,190 2719.76,110.24 D1.1
NetD1_2: D1.2 R6.2 | length 90.2
  Top Layer w10: R6.2 D1.2
NetD2_1: D2.1 D3.2 S8.2
NetD2_2: D2.2 R51.1
NetD3_1: D3.1 R53.1
NetD5_1: D5.1 R65.2 X23.1 | length 100
  Top Layer w10: R65.2 X23.1
"NetManual Gate_2": "Manual Gate.2" R57.1 R61.2 R62.1 X21.1 | length 303.1
  Top Layer w10: R62.1 R57.1 R61.2 240,970 X21.1
NetOutput_0: Output.0 R67.1 X27.1
"NetQ1 2N5457_3": "Q1 2N5457.3" R5.2 R6.1 | length 701.4
  Top Layer w10: R5.2 1980,520 1980,450 1901.67,371.67 1868.33,371.67 1868.33,340 1850,340 1860,330 1860,150 1920,90 R6.1
NetQ3_1: Q3.1 Q4.1 R4.2
NetQ3_2: Q3.2 R11.2 U1.8 | length 331.4
  Top Layer w10: U1.8 2600,1200 2650,1250 2700,1250 2750,1200 R11.2
NetQ6_2: Q6.2 R19.1 R25.1 | length 465.3
  Top Layer w10: R25.1 520,330 520,320 550,290 Q6.2 630,290 680,240 630,190 R19.1
NetQ6_3: Q6.3 R15.1 R19.2 S4.1 X4.1 | length 790.4
  Top Layer w10: Q6.3 610,340 R15.1 700,140 740,140 ; X4.1 780,180 740,140 ; R19.2 910,120 760,120 740,140
"NetQ7 2N5457_2": "Q7 2N5457.2" "R66 100K.3" R47.2 S5.2 X13.1 | length 449.7
  Top Layer w10: X13.1 540,920 787.37,920 813.37,946 846,946 R47.2
"NetQ7 2N5457_3": "Q7 2N5457.3" R41.1 R46.2 | length 1533.2
  Top Layer w10: 800,1640 800,1390 750,1340 610,1340 R41.1 510,1360 420,1270 420,1040 427.66,1032.34 501.68,1032.34 532.34,1001.68 532.34,950.29 546.63,936 736,936 R46.2
"NetQ8 2N5457_3": "Q8 2N5457.3" R40.2 R45.2 | length 273.1
  Top Layer w10: 1360,470 1390,440 1400,440 1400,390 R45.2 R40.2
"NetQ9 2N5457_2": "Q9 2N5457.2" R41.2 R54.2 S1.2 S6.1 U2.13 X18.1 | length 1522.3
  Top Layer w10: X18.1 530,1140 930,1140 ; 850,1890 850,1840 R54.2 900,1590 850,1540 850,1400 R41.2 930,1320 930,1140 ; U2.13 1130,1160 1100,1130 1047.31,1130 1046.79,1129.47 1013.21,1129.47 1002.69,1140 930,1140
"NetQ9 2N5457_3": "Q9 2N5457.3" R52.2
NetQ10_1: Q10.1 R57.2 S8.1 X22.1 | length 468.6
  Top Layer w10: Q10.1 119.32,1360.68 119.32,1347.6 140,1326.92 R57.2 170,1270 230.68,1330.68 230.68,1499.32 X22.1
NetQ10_2: Q10.2 R62.2 | length 344.9
  Top Layer w10: R62.2 50,1470 73.08,1470 130.68,1412.4 130.68,1399.32 Q10.2
NetR1_2: R1.2 R2.1 X1.1
NetR2_2: R2.2 R3.1 R11.1 R14.2 R21.2 U1.9 | length 1519.8
  Top Layer w10: R3.1 2600,800 2700,900 2700,1040 U1.9 2560,1300 2650,1300 2684,1266 2706.63,1266 2722.63,1250 2850,1250 R11.1
NetR7_1: R7.1 R12.2 U1.5 | length 249.7
  Top Layer w10: R12.2 2160,300 2160,334.53 2100,394.53 R7.1
NetR13_1: R13.1 S6.3 S9.2
NetR13_2: R13.2 R14.1 X2.1
NetR20_1: R20.1 S1.1
NetR20_2: R20.2 R21.1 X5.1
NetR26_2: R26.2 U2.5 | length 291.4
  Top Layer w10: 1450,840 1500,840 1550,790 1550,690 R26.2
NetR31_1: R31.1 U2.7
NetR31_2: R31.2 R32.1 S3.1 X7.1
NetR38_1: R38.1 S6.2
NetR38_2: R38.2 R39.1 X14.1 | length 114.9
  Top Layer w10: X14.1 1420,140 R39.1
NetR38_3: R38.3 R43.2
NetR39_2: R39.2 R40.1 R44.2 | length 541.4
  Top Layer w10: R44.2 1500,390 1500,290 1550,240 R40.1 R39.2
NetR48_2: R48.2 R49.3 X15.1
NetR50_1: R50.1 R51.3 X17.1
NetR51_2: R51.2 R53.2 R53.3
NetR55_2: R55.2 R59.2 R60.1 U2.10 | length 553.1
  Top Layer w10: U2.10 1470,1170 1500,1200 1500,1350 1450,1400 R55.2 ; R60.1 R59.2
NetR58_1: R58.1 R63.1 R64.1 U2.12 | length 240
  Top Layer w10: R58.1 R63.1 ; 1250,1200 R63.1 ; R64.1 R63.1
NetR58_2: R58.2 S8.3 U2.14 X19.1 | length 457.3
  Top Layer w10: U2.14 1020,1180 X19.1 1070,1270 1150,1350 R58.2
NetR67_2: "U Amp.3" R67.2 R68.2
pads on no net: Q5.3
copper on no net: | length 13780
  Top Layer w10: -6600,-260 -6600,2440 ; 0,0 0,2640 2900,2640 2900,0 0,0

## Text inside footprints (layer, text, board x,y; h text height)
B1: Top Overlay "+" at 444.49,2012.72 h45.28 r180
Output: Top Overlay "S" at 9330,7130 h25; Top Overlay "T" at 9330,7230 h25; Top Overlay "R" at 9330,7330 h25